# Altium PCB PCB1.PcbDoc
Units mm, origin at the board's own origin, x right, y up, seen from the top; angles counter-clockwise.
Board outline 100 x 80 mm, 2 copper layers (Top Layer, Bottom Layer), stack 1.671 mm thick; 62 components, 68 nets, 281 pads, 27 vias.
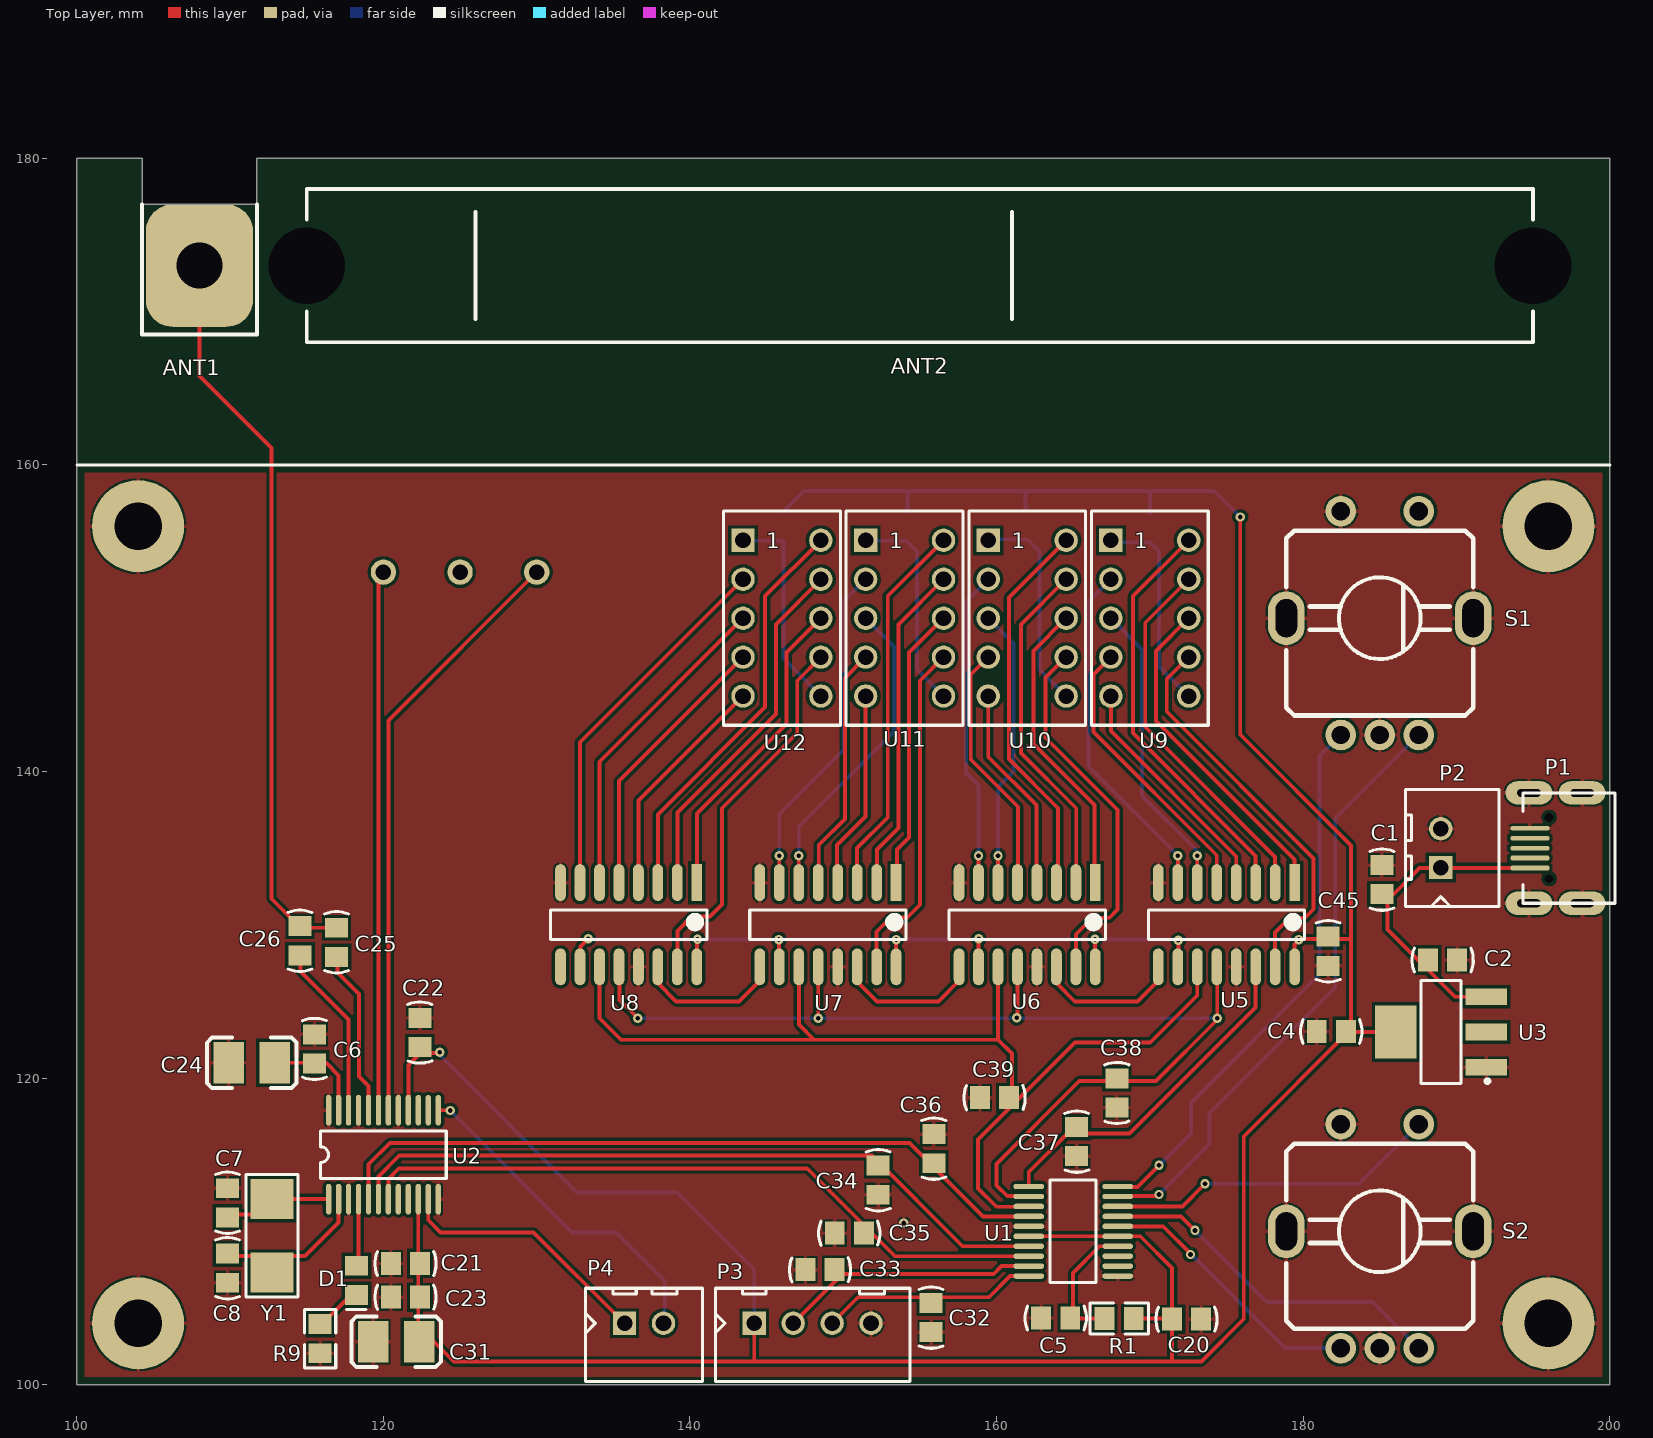
[diagram p0: Top Layer view]
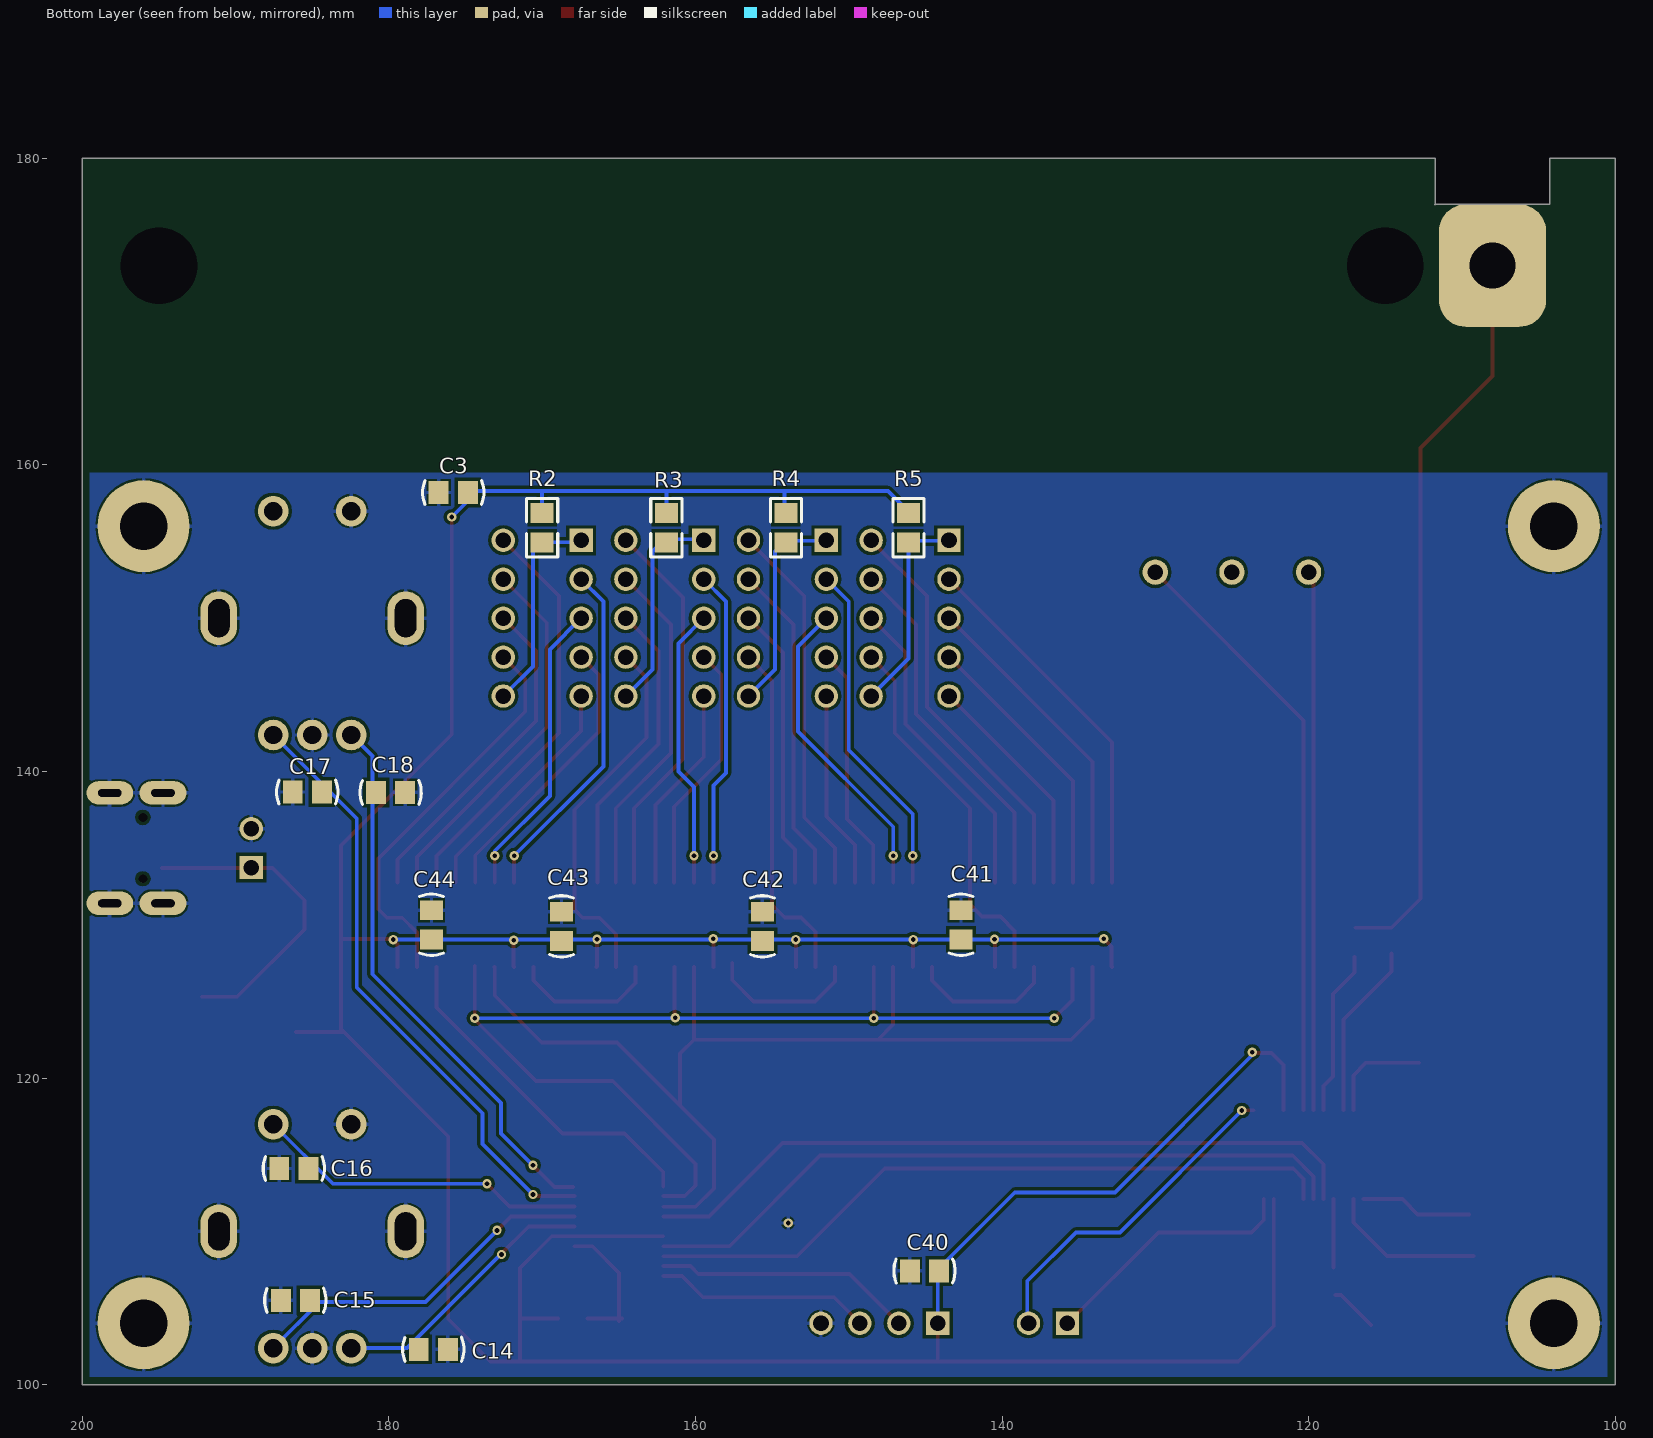
[diagram p1: Bottom Layer view, seen from below]
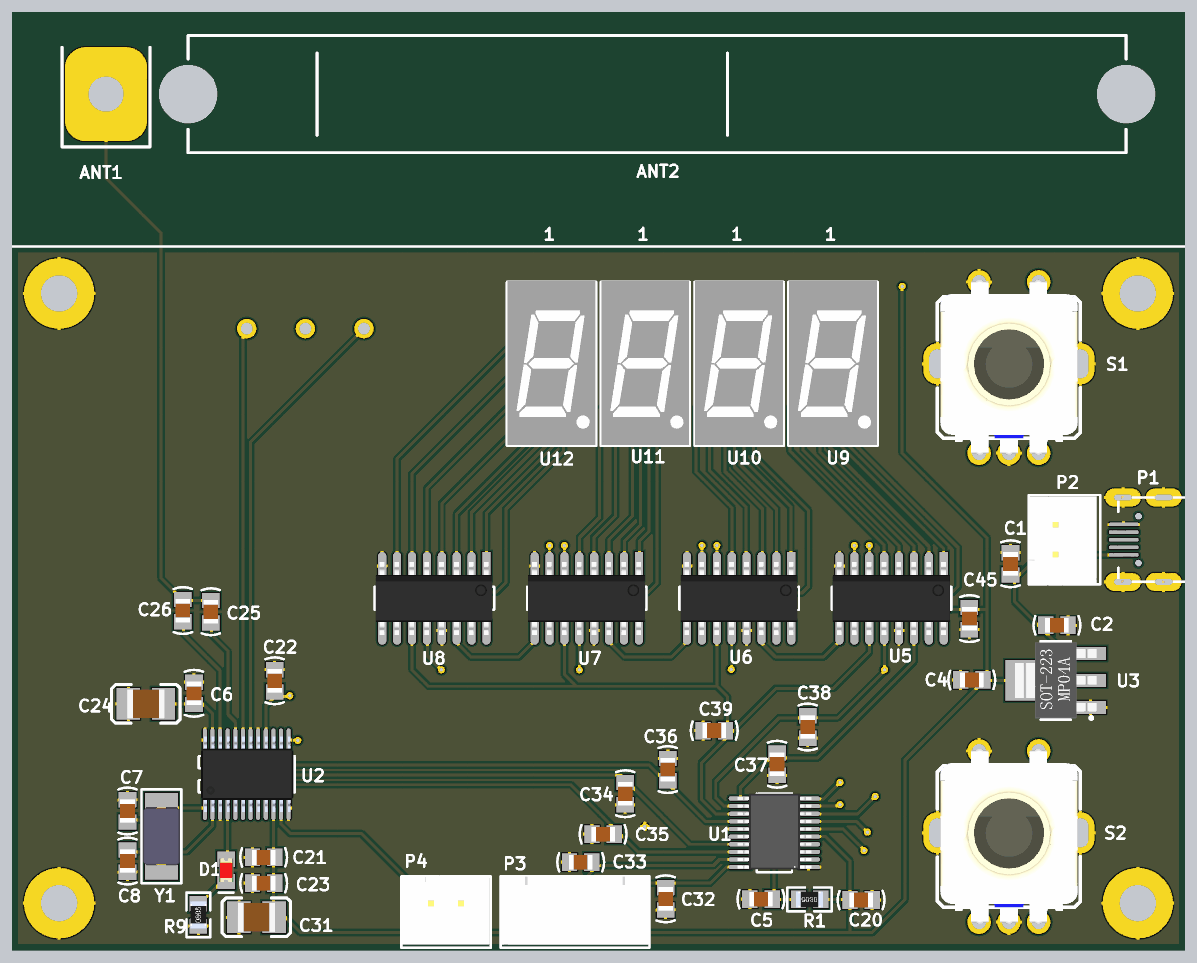
[diagram p2: 3D render of the assembled board from above, using the file's embedded part models]
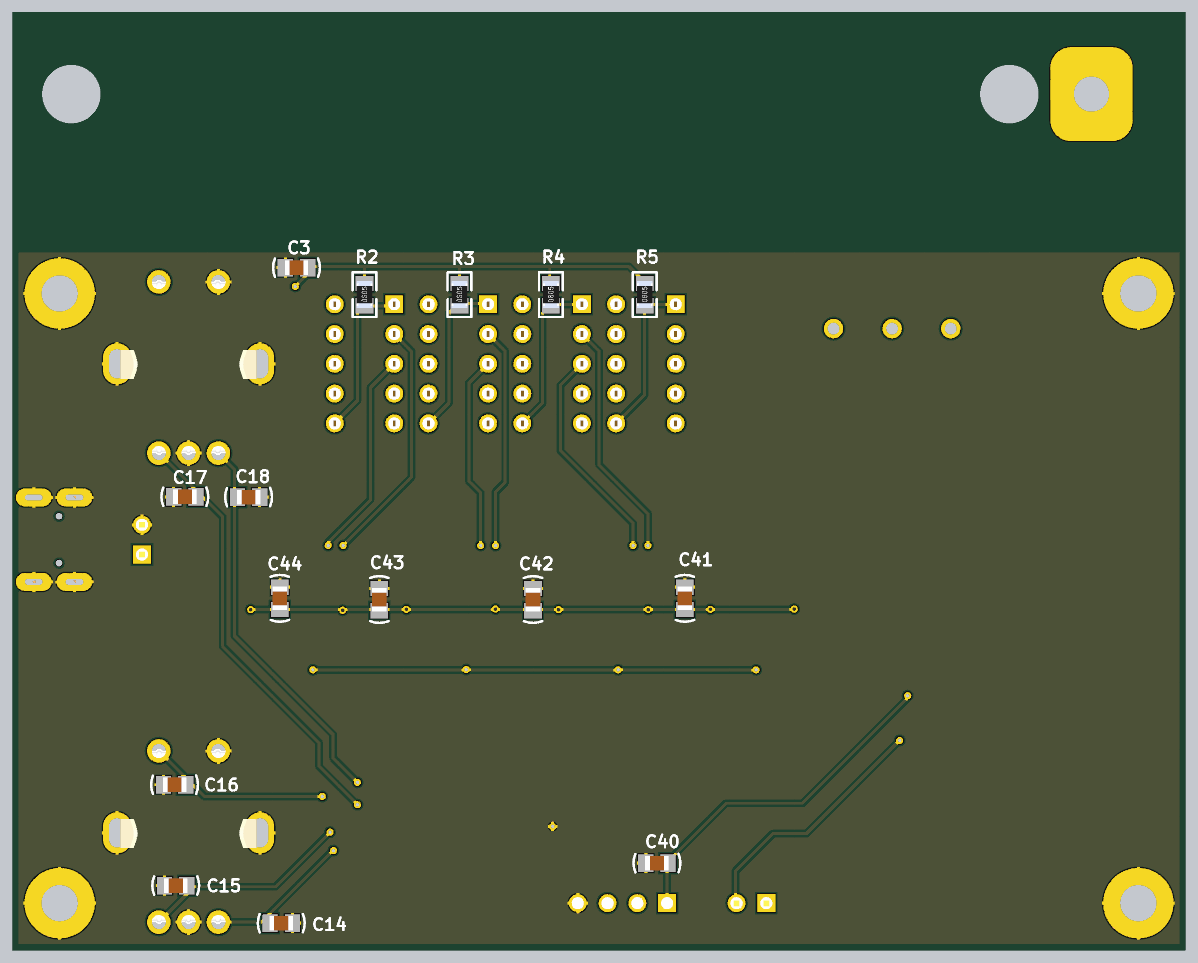
[diagram p3: 3D render of the assembled board from below, using the file's embedded part models]

## Layer stack, top to bottom
Top Solder: solder mask 0.0102, Solder Resist, Dk 3.5
Top Layer: signal copper 0.0356
Dielectric 1: dielectric 1.6, FR-4, Dk 4.8
Bottom Layer: signal copper 0.0356
Bottom Solder: solder mask 0.0102, Solder Resist, Dk 3.5

## Board outline
100,100 100,180 104.25,180 104.25,177 111.773,177 111.75,176.977 111.75,180 200,180 200,100

## Design rules (kind name [scope] priority, off if disabled: settings)
Clearance [All] p1: gap=0.203
PlaneClearance [All] p1: clearance=0.254
PlaneConnect [All] p1: planeconnectstyle=Relief reliefexpansion=0.508 reliefentries=4 reliefconductorwidth=0.254 reliefairgap=0.127
PolygonConnect [All] p1: connectstyle=Relief reliefconductorwidth=0.254 reliefentries=4 polygonreliefangle="90 Angle" airgapwidth=0.127
RoomDefinition Sheet1 [InComponentClass('Sheet1')] p1: confinementstyle=ConfineIn formatcopy=TRUE lockcomponents=FALSE outline 92.776,94.234 203.556,94.234 203.556,247.091 92.776,247.091
RoutingVias [All] p1: holewidth=0.711 width=1.27 viastyle="Through Hole" minholewidth=0.711 minwidth=1.27 maxholewidth=0.711 maxwidth=1.27
SolderMaskExpansion [All] p1: expansion=0.102
Width [All] p1: maxlimit=0.254 minlimit=0.254 preferedwidth=0.254
27 further rules are at their usual default settings.

## Components (designator, comment, footprint, x,y, rotation, side; value= is the part's Value field where it differs from the comment)
ANT1 "ANT-Radio-SW" ANT-Radio-R7 108,173 r0 top
ANT2 "ANT-Radio-MW" ANT-Radio-MW-8x80 155,173 r0 top
C1 "104" C-0805 185.141,132.944 r270 top
C2 "102" C-0805 189.1,127.7 r180 top
C3 "102" C-0805 175.8,158.2 r180 bottom
C4 "104" C-0805 181.839,123.038 r0 top
C5 "104" C-0805 163.859,104.343 r180 top
C6 "104" C-0805 115.5,121.9 r90 top
C7 "22p" C-0805 109.83,111.862 r90 top
C8 "22p" C-0805 109.83,107.594 r270 top
C14 "102" C-0805 177.1,102.3 r0 bottom
C15 "102" C-0805 186.1,105.5 r180 bottom
C16 "102" C-0805 186.2,114.1 r180 bottom
C17 "102" C-0805 185.322,138.659 r180 bottom
C18 "102" C-0805 179.887,138.633 r0 bottom
C20 "102" C-0805 172.394,104.267 r180 top
C21 "102" C-0805 121.442,107.901 r0 top
C22 "102" C-0805 122.377,122.967 r270 top
C23 "104" C-0805 121.442,105.701 r0 top
C24 "106" C-1210 111.4,121 r0 top
C25 "302" C-0805 116.942,128.854 r90 top
C26 "101" C-0805 114.554,128.956 r90 top
C31 "106" C-1210 120.828,102.794 r180 top
C32 "101" C-0805 155.727,104.369 r270 top
C33 "101" C-0805 148.484,107.493 r180 top
C34 "101" C-0805 152.277,113.335 r270 top
C35 "101" C-0805 150.393,109.88 r180 top
C36 "101" C-0805 155.909,115.392 r90 top
C37 "101" C-0805 165.231,115.849 r90 top
C38 "101" C-0805 167.847,119.024 r90 top
C39 "101" C-0805 159.871,118.72 r0 top
C40 "102" C-0805 145.059,107.417 r180 bottom
C41 "102" C-0805 142.676,129.997 r270 bottom
C42 "102" C-0805 155.63,129.896 r270 bottom
C43 "102" C-0805 168.736,129.896 r270 bottom
C44 "102" C-0805 177.22,129.997 r270 bottom
C45 "102" C-0805 181.635,128.27 r90 top
D1 "LED" LED-0805 118.242,106.801 r270 top
P1 "USB_Micro" USB-MICRO-3 200.355,135.001 r90 top
P2 "Header 2" XH2.54-2P 188.976,135.001 r90 top
P3 "SWD" XH2.54-4P 148,104 r0 top
P4 "Header 2" XH2.54-2P 137,104 r0 top
R1 "10k" 0805 167.999,104.318 r180 top
R2 "120" 0805 170,155.9 r90 bottom
R3 "120" 0805 161.9,155.9 r90 bottom
R4 "120" 0805 154.1,155.9 r90 bottom
R5 "120" 0805 146.1,155.9 r90 bottom
R9 "220" 0805 115.875,102.997 r90 top
S1 "SW-EC11" SW-EC11 185,150 r0 top
S2 "SW-EC11" SW-EC11 185,110 r0 top
U1 "STM32F030F4P6" TSSOP-20 165,110 r180 top
U2 "AKC6955" TSSOP-24 120,115 r90 top
U3 "AMS1117-3.3" SOT223 189,123 r90 top
U5 "74HC595" SOIC-16 175,130 r270 top
U6 "74HC595" SOIC-16 162,130 r270 top
U7 "74HC595" SOIC-16 149,130 r270 top
U8 "74HC595" SOIC-16 136,130 r270 top
U9 "7SEG-1CA" 7-SEG-1BIT-0.36 170,150 r0 top
U10 "7SEG-1CA" 7-SEG-1BIT-0.36 162,150 r0 top
U11 "7SEG-1CA" 7-SEG-1BIT-0.36 154,150 r0 top
U12 "7SEG-1CA" 7-SEG-1BIT-0.36 146,150 r0 top
Y1 "12MHz" X-5032-2 112.725,109.703 r90 top

## Footprints (in the part's own frame and the unit in brackets; to place one, negate y for a bottom-side part, rotate by r counter-clockwise, add the part's x,y. Pads: shape width x height; smd on the part's side, far side on the other; paste and mask are expansions set on the pad)
7-SEG-1BIT-0.36 [mil] "数码管"
  rect 60x60 hole 40: 1(-100,200)
  round 60 hole 40: 2(-100,100) 3(-100,0) 4(-100,-100) 5(-100,-200) 6(100,-200) 7(100,-100) 8(100,0) 9(100,100) 10(100,200)
  silkscreen extent -150,-275 150,275, body extent -148,-272 147,279, height 336
0805 [mm]
  rect 1.3x1.5 smd: 1(-0.95,0) 2(0.95,0)
  silkscreen extent -1.91,-1.02 1.91,1.02, body extent -1.15,-0.67 1.15,0.68, height 0.75
ANT-Radio-MW-8x80 [mm]
  round 2 hole 5 unplated: 0(-40,0) 0(40,0)
  round 1.651 hole 1.016: 1(-35,-20) 2(-30,-20) 3(-25,-20)
  silkscreen extent -40,-5 40,5, body extent -40,-4.96 40,5, height 9.99
ANT-Radio-R7 [mm]
  rrect50% 7x8 hole 3: 1(0,0)
  Top Layer pour cut-out: -4,-4.5 4,-4.5 4,13.75 -4,13.75
  silkscreen extent -3.75,-4.5 3.75,4, body extent -3.5,-3 3.5,68, height 4.29
C-0805 [mm]
  rect 1.3x1.5 smd: 1(-0.95,0) 2(0.95,0)
  silkscreen extent -2,-0.79 2,0.79, body extent -1,-0.62 1,0.63, height 0.6
C-1210 [mm]
  rect 2x2.7 smd: 1(1.5,0) 2(-1.5,0)
  silkscreen extent -2.92,-1.65 2.92,1.65, body extent -1.6,-1.25 1.6,1.25, height 1.3
LED-0805 [mm]
  rect 1.3x1.5 smd: 1(-0.95,0) 2(0.95,0)
  silkscreen extent 1.91,-0.63 1.91,0.64, body extent -1.01,-0.62 1.01,0.62, height 1.1
SOIC-16 [mm]
  rect 2.4x0.7 smd: 1(-2.75,4.445)
  oval 2.4x0.7 smd: 2(-2.75,3.175) 3(-2.75,1.905) 4(-2.75,0.635) 5(-2.75,-0.635) 6(-2.75,-1.905) 7(-2.75,-3.175) 8(-2.75,-4.445) 9(2.75,-4.445) 10(2.75,-3.175) 11(2.75,-1.905) 12(2.75,-0.635) 13(2.75,0.635) 14(2.75,1.905) 15(2.75,3.175) 16(2.75,4.445)
  silkscreen extent -0.97,-5.1 0.97,5.1, body extent -3.08,-5.02 3.12,4.98, height 1.75
SOT223 [mm]
  rect 1.1x2.7 smd: 1(-2.3,-2.95) 2(0,-2.95) 3(2.3,-2.95)
  rect 3.45x2.7 smd: 4(0,2.95)
  silkscreen extent -3.35,-3.15 3.35,1.3, body extent -3.25,-3.48 3.25,3.48, height 1.7
SW-EC11 [mm] "旋转编码开关"
  round 2 hole 1.2: 1(-2.54,-7.62) 2(0,-7.62) 3(2.54,-7.62) 4(2.54,6.985) 5(-2.54,6.985)
  oval 2.4x3.5 hole 1.4 slot 2.5 at 90 deg: 6(-6.096,0) 7(6.096,0)
  silkscreen extent -6.1,-6.35 6.1,5.71, body extent -5.84,-7.78 5.87,7.17, height 24.5
TSSOP-20 [mm] "E=4.4mm"
  oval 2x0.35 smd: 1(-2.9,2.925) 2(-2.9,2.275) 3(-2.9,1.625) 4(-2.9,0.975) 5(-2.9,0.325) 6(-2.9,-0.325) 7(-2.9,-0.975) 8(-2.9,-1.625) 9(-2.9,-2.275) 10(-2.9,-2.925) 11(2.9,-2.925) 12(2.9,-2.275) 13(2.9,-1.625) 14(2.9,-0.975) 15(2.9,-0.325) 16(2.9,0.325) 17(2.9,0.975) 18(2.9,1.625) 19(2.9,2.275) 20(2.9,2.925)
  silkscreen extent -1.5,-3.35 1.5,3.35, body extent -3.15,-3.35 3.13,3.15, height 1.09
TSSOP-24 [mm] "E=4.4mm"
  oval 2x0.35 smd: 1(-2.9,3.575) 2(-2.9,2.925) 3(-2.9,2.275) 4(-2.9,1.625) 5(-2.9,0.975) 6(-2.9,0.325) 7(-2.9,-0.325) 8(-2.9,-0.975) 9(-2.9,-1.625) 10(-2.9,-2.275) 11(-2.9,-2.925) 12(-2.9,-3.575) 13(2.9,-3.575) 14(2.9,-2.925) 15(2.9,-2.275) 16(2.9,-1.625) 17(2.9,-0.975) 18(2.9,-0.325) 19(2.9,0.325) 20(2.9,0.975) 21(2.9,1.625) 22(2.9,2.275) 23(2.9,2.925) 24(2.9,3.575)
  silkscreen extent -1.55,-4.1 1.55,4.1, body extent -3.2,-3.99 3.2,3.9, height 1.16
USB-MICRO-3 [mm]
  round 0.5 hole 0.584 unplated: 0(-2,4.3) 0(2,4.3)
  oct 0.305x2.54 smd: 1(-1.3,5.564) 2(-0.65,5.564) 3(0,5.564) 4(0.65,5.564) 5(1.3,5.564)
  oval 1.524x3.048 hole 0.508 slot 1.524 at 90 deg: 6(3.6,2.15) 7(-3.6,2.15) 8(3.6,5.62) 9(-3.6,5.62)
  silkscreen extent -3.6,0 3.6,6.02
X-5032-2 [mm]
  rect 2.6x2.8 smd: 1(-2.4,0) 2(2.4,0)
  silkscreen extent -4,-1.7 4,1.7, body extent -2.5,-1.6 2.5,1.6, height 1.3
XH2.54-2P [mil] "XH2.54端子直针"
  rect 60x60 hole 40: 1(-50,0)
  round 60 hole 40: 2(50,0)
  silkscreen extent -150,-150 150,90, body extent -146,-138 146,90, height 276
XH2.54-4P [mil] "XH2.54端子直针"
  rect 60x60 hole 40: 1(-150,0)
  round 60 hole 40: 2(-50,0) 3(50,0) 4(150,0)
  silkscreen extent -250,-150 250,90, body extent -246,-139 246,89, height 276

## Part data
ANT1: "收音机拉杆天线"
ANT2: "收音机中波磁棒天线"
C1 C2 C3 C4 C5 C6 C7 C8 C14 C15 C16 C17 C18 C20 C21 C22 C23 C24 C25 C26 C31 C32 C33 C34 C35 C36 C37 C38 C39 C40 C41 C42 C43 C44 C45: library part CAP, "电容"
P1: library part USB-Micro-3, "Micro USB"
P2 P4: "接插件"
P3: "SWD接口"
R1 R2 R3 R4 R5 R9: library part RES, "电阻"
S1 S2: "旋转编码开关"
U1: "STM32 单片机"
U2: "DSP数字收音机芯片"
U3: "3.3V稳压器"
U5 U6 U7 U8: "移位寄存器"
U9 U10 U11 U12: "共阳1位数码管"
Y1: library part XTAL, "晶振"

## Free pads (board coordinates)
  round 6 hole 3.1: 0(104,104) 1(196,104) 2(196,156) 3(104,156)

## Via types
v1: diameter 0.61, hole 0.305, Top Layer to Bottom Layer, 27 vias

## Nets (pads, with @x,y where several pads share a name; then routed paths per layer and width w, separated by ;. In a path a pad name is that pad's centre, name@x,y a point inside that pad or via, vN(x,y) a via of type N, cw(c..) or ccw(c..) an arc to the next point about the centre after c; other vN are vias at no path point)
ENCODER1_A: C18.2 S1.1 U1.10 | length 36.2
  Top Layer w0.254: U1.10@168,112.9 169.2,112.9 v1(170.6,114.3)
  Bottom Layer w0.254: v1(170.6,114.3) 172.673,116.373 172.673,118.364 181.077,126.768 181.077,140.997 S1.1
ENCODER1_B: C17.2 S1.3 U1.9 | length 39.7
  Top Layer w0.254: U1.9@167.9,112.3 170.5,112.3 v1(170.6,112.4)
  Bottom Layer w0.254: v1(170.6,112.4) 173.892,115.692 173.892,117.704 182.093,125.904 182.093,136.933 S1.3
ENCODER2_A: C14.2 S2.1 U1.6 | length 18
  Top Layer w0.254: U1.6 170.875,110.325 172.717,108.483 v1(172.648,108.483)
  Bottom Layer w0.254: v1(172.648,108.483) 172.717,108.483 178.82,102.38 S2.1
ENCODER2_B: C15.2 S2.3 U1.7 | length 23.2
  Top Layer w0.254: U1.7 172.025,110.975 v1(172.942,110.058)
  Bottom Layer w0.254: v1(172.942,110.058) 177.6,105.4 184.52,105.4 S2.3
GND: C1.1 C2.1 C3.1 C4.1 C5.2 C6.2 C7.2 C8.2 C14.1 C15.1 C16.1 C17.1 C18.1 C20.1 C21.1 C22.1 C23.1 C24.2 C31.1 C32.2 C33.2 C34.2 C35.2 C36.2 C37.1 C38.1 C39.1 C40.1 C41.1 C42.1 C43.1 C44.1 C45.1 P1.5 P1.6 P1.7 P1.8 P1.9 P2.2 P3.4 pad.0 pad.1 pad.2 pad.3 R9.1 S1.2 S1.5 S1.6 S1.7 S2.2 S2.5 S2.6 S2.7 U1.1 U1.15 U2.3 U2.12 U2.17 U2.21 U2.24 U3.1 U5.8 U5.13 U6.8 U6.13 U7.8 U7.13 U8.8 U8.13
  other v1: 153.953,110.541
NetANT1_1: ANT1.1 C25.2 C26.2 | length 48.3
  Top Layer w0.254: ANT1.1 108,165.812 112.7,161.112 112.7,131.699 114.595,129.804 C25.2
NetANT2_1: ANT2.1 U2.19 | length 35.2
  Top Layer w0.254: U2.19 119.675,152.675 ANT2.1
NetANT2_3: ANT2.3 U2.18 | length 39.1
  Top Layer w0.254: U2.18 120.325,143.325 ANT2.3
NetC5_1: C5.1 R1.2 U1.4 | length 9
  Top Layer w0.254: C5.1@164.8,104.303 R1.2@167.049,104.303 ; C5.1@164.977,104.14 164.977,107.277 166.725,109.025 U1.4
NetC6_1: C6.1 C24.1 U2.23 | length 6.9
  Top Layer w0.254: C24.1@112.8,121 116.25,121 117.075,120.175 U2.23
NetC7_1: C7.1 U2.1 Y1.2 | length 7.3
  Top Layer w0.254: C7.1@109.535,111.108 112.886,111.108 113.878,112.1 U2.1
NetC8_1: C8.1 U2.2 Y1.1 | length 10.3
  Top Layer w0.254: C8.1@109.245,108.382 114.882,108.382 117.075,110.575 U2.2
NetC25_1: C25.1 U2.20 | length 10.8
  Top Layer w0.254: C25.1@117,127.904 117,126.891 118.4,125.491 118.4,120.1 119.025,119.475 U2.20
NetC26_1: C26.1 U2.22 | length 11.5
  Top Layer w0.254: C26.1@114.6,128.143 114.6,126.954 117.725,123.829 U2.22
NetC37_2: C37.2 U1.11 U5.14 | length 22.8
  Top Layer w0.254: U1.11 162.1,113.862 164.621,116.383 168.683,116.383 176.905,124.605 U5.14
NetC38_2: C38.2 U1.12 U5.12 U6.12 U7.12 U8.12 | length 73.8
  Top Layer w0.254: U8.12@135.4,127.1 135.4,125.1 v1(136.6,123.9) ; v1(148.365,123.901) U7.12 ; v1@161.365,123.9 U6.12 ; U1.12@162.1,112.3 160.7,112.3 160,113 160,114.403 165.397,119.8 170.4,119.8 174.4,123.8 U5.12@174.4,127.3
  Bottom Layer w0.254: v1(136.6,123.9) v1(174.4,123.9)
  other v1: 161.319,123.927
NetC39_2: C39.2 U1.13 U5.11 U6.11 U7.11 U8.11 | length 71.6
  Top Layer w0.254: U8.11 134.1,127.255 134.1,123.9 135.5,122.5 160.1,122.5 ; U7.11 147.1,127.255 147.1,123.5 148.1,122.5 ; U6.11 160.1,127.255 160.1,122.5 ; C39.2@161,118.2 161,121.6 160.1,122.5 ; U1.13@162.1,111.6 160,111.6 158.8,112.8 158.8,116 165.126,122.326 170.026,122.326 173.095,125.395 U5.11 U5.11@173.1,127.255
NetD1_1: D1.1 U2.4 | length 4.5
  Top Layer w0.254: D1.1@118.375,107.627 U2.4
NetD1_2: D1.2 R9.2 | length 3.1
  Top Layer w0.254: R9.2@115.931,103.891 117.891,105.851 D1.2
NetP4_1: P4.1 U2.11 | length 17
  Top Layer w0.254: U2.11 122.925,110.73 123.723,109.931 129.799,109.931 P4.1
NetP4_2: P4.2 U2.13 | length 22.1
  Top Layer w0.254: U2.13 v1@124.34,117.9
  Bottom Layer w0.254: v1(124.358,117.881) 132.309,109.931 135.178,109.931 138.354,106.755 P4.2@138.354,104
NetR2_1: R2.1 U9.1 U9.6 | length 13.7
  Bottom Layer w0.254: U9.1 167.59,154.95 R2.1 170.6,154.35 170.6,146.86 U9.6
NetR3_1: R3.1 U10.1 U10.6 | length 13.9
  Bottom Layer w0.254: U10.1 159.53,155.15 162,155.15 162.8,154.35 162.8,146.66 U10.6
NetR4_1: R4.1 U11.1 U11.6 | length 13.8
  Bottom Layer w0.254: U11.1 151.49,155.05 154.1,155.05 154.8,154.35 154.8,146.66 U11.6
NetR5_1: R5.1 U12.1 U12.6 | length 13.8
  Bottom Layer w0.254: U12.1 143.49,155.05 146.1,155.05 146.1,147.36 U12.6
NetU5_1: U5.1 U9.8 | length 21.9
  Top Layer w0.254: U9.8 170.4,147.86 170.4,143.3 179.445,134.255 U5.1
NetU5_2: U5.2 U9.9 | length 24.5
  Top Layer w0.254: U9.9 169.7,149.7 169.7,142.9 178.175,134.425 U5.2
NetU5_3: U5.3 U9.10 | length 27.2
  Top Layer w0.254: U9.10 168.9,151.44 168.9,142.5 176.905,134.495 U5.3
NetU5_4: U5.4 U9.5 | length 15.6
  Top Layer w0.254: U9.5 167.46,142.64 175.635,134.465 U5.4
NetU5_5: U5.5 U9.4 | length 18.5
  Top Layer w0.254: U9.4 166.317,146.317 166.317,142.583 174.365,134.535 U5.5
NetU5_6: U5.6 U9.3 | length 19.6
  Top Layer w0.254: U5.6 v1(173.095,134.5)
  Bottom Layer w0.254: U9.3 169.492,147.968 169.492,138.408 173.095,134.805 v1(173.095,134.5)
NetU5_7: U5.7 U9.2 | length 22.8
  Top Layer w0.254: U5.7 v1(171.825,134.5)
  Bottom Layer w0.254: U9.2 166,151.08 166,140.325 v1(171.825,134.5)
NetU5_9: U5.9 U6.14 | length 9.7
  Top Layer w0.254: U6.14 163.905,126.195 165.1,125 169.2,125 170.555,126.355 U5.9
NetU5_15: U5.15 U9.7 | length 26.4
  Top Layer w0.254: U9.7 171.1,146.02 171.1,143.9 180.674,134.326 180.674,131.013 180.115,130.454 179.125,130.454 178.175,129.505 U5.15
NetU6_1: U6.1 U10.8 | length 19.8
  Top Layer w0.254: U10.8 162.4,147.86 162.4,141.8 166.4,137.8 U6.1@166.4,132.75
NetU6_2: U6.2 U10.9 | length 22.5
  Top Layer w0.254: U10.9 161.6,149.6 161.6,141.2 165.2,137.6 U6.2@165.2,132.75
NetU6_3: U6.3 U10.10 | length 25.2
  Top Layer w0.254: U6.3@164,132.75 164,137.6 160.8,140.8 160.8,151.34 U10.10
NetU6_4: U6.4 U10.5 | length 13.5
  Top Layer w0.254: U10.5 159.46,140.94 162.6,137.8 U6.4@162.6,132.75
NetU6_5: U6.5 U10.4 | length 16.5
  Top Layer w0.254: U10.4 158.317,146.317 158.317,140.783 161.4,137.7 U6.5@161.4,132.75
NetU6_6: U6.6 U10.3 | length 18.3
  Top Layer w0.254: U6.6 v1(160.095,134.5)
  Bottom Layer w0.254: U10.3 161.1,148.36 161.1,140 160.095,138.995 v1(160.095,134.5)
NetU6_7: U6.7 U10.2 | length 20.7
  Top Layer w0.254: U6.7 v1(158.825,134.5)
  Bottom Layer w0.254: v1(158.825,134.5) 158.825,139.075 158,139.9 158,151.08 U10.2
NetU6_9: U6.9 U7.14 | length 9.9
  Top Layer w0.254: U7.14 150.905,126.295 152.2,125 156.2,125 157.6,126.4 U6.9@157.6,127.5
NetU6_15: U6.15 U10.7 | length 24.5
  Top Layer w0.254: U10.7 163.2,146.12 163.2,142.2 167.9,137.5 167.9,130.99 167.364,130.454 166.247,130.454 165.175,129.383 U6.15
NetU7_1: U7.1 U11.8 | length 18.5
  Top Layer w0.254: U7.1@153.5,132.75 153.5,134.9 154.3,135.7 154.3,147.76 U11.8
NetU7_2: U7.2 U11.9 | length 21.6
  Top Layer w0.254: U7.2@152.2,132.75 152.2,134.9 153.6,136.3 153.6,149.6 U11.9
NetU7_3: U7.3 U11.10 | length 24.7
  Top Layer w0.254: U7.3@150.9,132.75 150.9,135 152.9,137 152.9,151.44 U11.10
NetU7_4: U7.4 U11.5 | length 12.9
  Top Layer w0.254: U7.4@149.6,132.75 149.6,135.2 151.46,137.06 U11.5
NetU7_5: U7.5 U11.4 | length 16
  Top Layer w0.254: U7.5@148.4,132.75 148.4,135.2 150.1,136.9 150.1,146.1 U11.4
NetU7_6: U7.6 U11.3 | length 20.6
  Top Layer w0.254: U7.6 v1(147.095,134.5)
  Bottom Layer w0.254: v1(147.095,134.5) 147.095,136.395 153.3,142.6 153.3,148.16 U11.3
NetU7_7: U7.7 U11.2 | length 22.1
  Top Layer w0.254: U7.7 v1(145.825,134.5)
  Bottom Layer w0.254: v1(145.825,134.5) 145.825,137.225 150,141.4 150,151.08 U11.2
NetU7_9: U7.9 U8.14 | length 9.7
  Top Layer w0.254: U8.14 137.905,126.195 139.1,125 143.2,125 144.555,126.355 U7.9
NetU7_15: U7.15 U11.7 | length 22.6
  Top Layer w0.254: U7.15 152.175,129.54 153.115,130.48 154.175,130.48 155,131.304 155,145.92 U11.7
NetU8_1: U8.1 U12.8 | length 20.6
  Top Layer w0.254: U8.1 140.445,137.245 146.3,143.1 146.3,147.76 U12.8
NetU8_2: U8.2 U12.9 | length 23.7
  Top Layer w0.254: U8.2 139.175,137.33 145.6,143.755 145.6,149.6 U12.9
NetU8_3: U8.3 U12.10 | length 26.7
  Top Layer w0.254: U8.3 137.905,137.205 144.9,144.2 144.9,151.44 U12.10
NetU8_4: U8.4 U12.5 | length 15
  Top Layer w0.254: U8.4 136.635,138.095 U12.5
NetU8_5: U8.5 U12.4 | length 18.1
  Top Layer w0.254: U8.5 135.365,139.365 U12.4
NetU8_6: U8.6 U12.3 | length 21.1
  Top Layer w0.254: U8.6 134.095,140.635 U12.3
NetU8_7: U8.7 U12.2 | length 24.2
  Top Layer w0.254: U8.7 132.825,141.905 U12.2
NetU8_15: U8.15 U12.7 | length 24.8
  Top Layer w0.254: U8.15 139.175,129.595 140.11,130.531 141.304,130.531 142.1,131.327 142.1,137.6 147,142.5 147,145.92 U12.7
P_ON: C36.1 U1.14 U2.5 | length 47.9
  Top Layer w0.254: U2.5 119.025,114.377 120.421,115.773 154.327,115.773 159.125,110.975 U1.14
PUSH2: C16.2 S2.4 U1.8 | length 21.9
  Top Layer w0.254: U1.8 172.125,111.625 v1(173.6,113.1)
  Bottom Layer w0.254: v1(173.6,113.1) 183.655,113.1 S2.4
SCL: C34.1 U1.17 U2.6 | length 46.9
  Top Layer w0.254: U2.6 119.675,113.579 121.031,114.935 151.87,114.935 157.78,109.025 U1.17
SDA: C35.1 U1.18 U2.7 | length 45.8
  Top Layer w0.254: U2.7 120.325,113.425 121,114.1 147.651,114.1 153.376,108.375 U1.18
SWCLK: C32.1 P3.3 U1.20 | length 14.1
  Top Layer w0.254: P3.3 150.97,105.7 159.5,105.7 160.875,107.075 U1.20
SWDIO: C33.1 P3.2 U1.19 | length 17.1
  Top Layer w0.254: P3.2@146.587,103.857 149.943,107.213 159.813,107.213 160.325,107.725 U1.19
VCC: C3.2 C4.2 C20.2 C21.2 C22.2 C23.2 C31.2 C40.2 C41.2 C42.2 C43.2 C44.2 C45.2 P3.1 R1.1 R2.2 R3.2 R4.2 R5.2 U1.5 U1.16 U2.10 U2.16 U3.4 U5.10 U5.16 U6.10 U6.16 U7.10 U7.16 U8.10 U8.16 | length 281.8
  Top Layer w0.254: U2.16 121.625,120.838 122.407,121.62 v1@123.673,121.62 ; U2.10 122.275,103.81 124.587,101.498 173.359,101.498 176.127,104.267 176.127,116.194 183.134,123.2 183.134,135.166 175.9,142.4 v1(175.9,156.6) ; U8.10 132.846,127.271 132.846,128.575 v1(133.354,129.083) ; U8.16 140.466,127.271 v1@140.466,129.007 ; 144.19,101.53 P3.1 ; v1(145.8,129.032) 145.8,127.275 U7.10 ; U7.16@153.445,127.25 v1(153.445,129.032) ; U6.10 158.83,127.255 v1(158.83,129.083) ; U1.16 U1.5 169.373,109.675 171.444,107.605 171.444,101.509 ; v1(166.425,129.057) 166.425,127.27 U6.16 ; R1.1 C20.2@171.393,104.318 ; U5.10 171.86,127.285 v1(171.86,128.981) ; U5.16 179.445,128.717 179.785,129.057 183.134,129.057 ; C4.2@182.956,123 U3.4
  Bottom Layer w0.254: v1(123.673,121.691) 123.673,121.491 132.641,112.522 139.167,112.522 144.19,107.499 P3.1@144.19,104.031 ; v1@133.354,129.057 133.379,129.032 v1@179.836,129.032 ; R5.2@146.1,156.95 147.45,158.3 174.2,158.3 174.575,157.925 v1(175.9,156.6) ; R4.2@154.1,156.95 154.2,157.05 154.2,158.3 ; 161.9,158.3 161.9,157.15 R3.2@162,157.05 ; R2.2 170,158.3
  other v1: 179.709,129.032 140.491,129.057
VCC5: C1.2 C2.2 P1.1 P2.1 U3.3 | length 20.6
  Top Layer w0.254: U3.3@192.2,125.3 189.9,125.3 185.5,129.7 185.5,131.601 187.599,133.7 P1.1
pads on no net: ANT2.0 ANT2.2 P1.0 P1.2 P1.3 P1.4 S1.4 U1.2 U1.3 U2.8 U2.9 U2.14 U2.15 U3.2 U8.9

## Polygon pours and split planes (outlines as drawn)
GND on Bottom Layer "Top Paste-No Net" (solid, remove dead copper, pour order 4): 100.5,100.5 199.5,100.5 199.5,159.5 100.5,159.5
GND on Top Layer "Top Paste-No Net" (solid, remove dead copper, pour order 3): 100.5,100.5 199.5,100.5 199.5,159.5 100.5,159.5

## Silkscreen, mask and mechanical layers (free items; w line width, h text height)
Top Overlay:
  lines w0.203: 100,160 200,160
Mechanical 1:
  the board outline again, w0.203

## Text inside footprints (layer, text, board x,y; h text height)
U9: Top Overlay "1" at 168.984,154.572 h1.02
U10: Top Overlay "1" at 160.984,154.572 h1.02
U11: Top Overlay "1" at 152.984,154.572 h1.02
U12: Top Overlay "1" at 144.984,154.572 h1.02